# Altium PCB LacewingPXE_v3p1.PcbDoc (part 2 of 2)
Units mm, origin at the board's own origin, x right, y up, seen from the top; angles counter-clockwise.
Board outline 62.74 x 108.59 mm, 2 copper layers (Top Layer, Bottom Layer); 114 components, 91 nets, 535 pads, 84 vias.
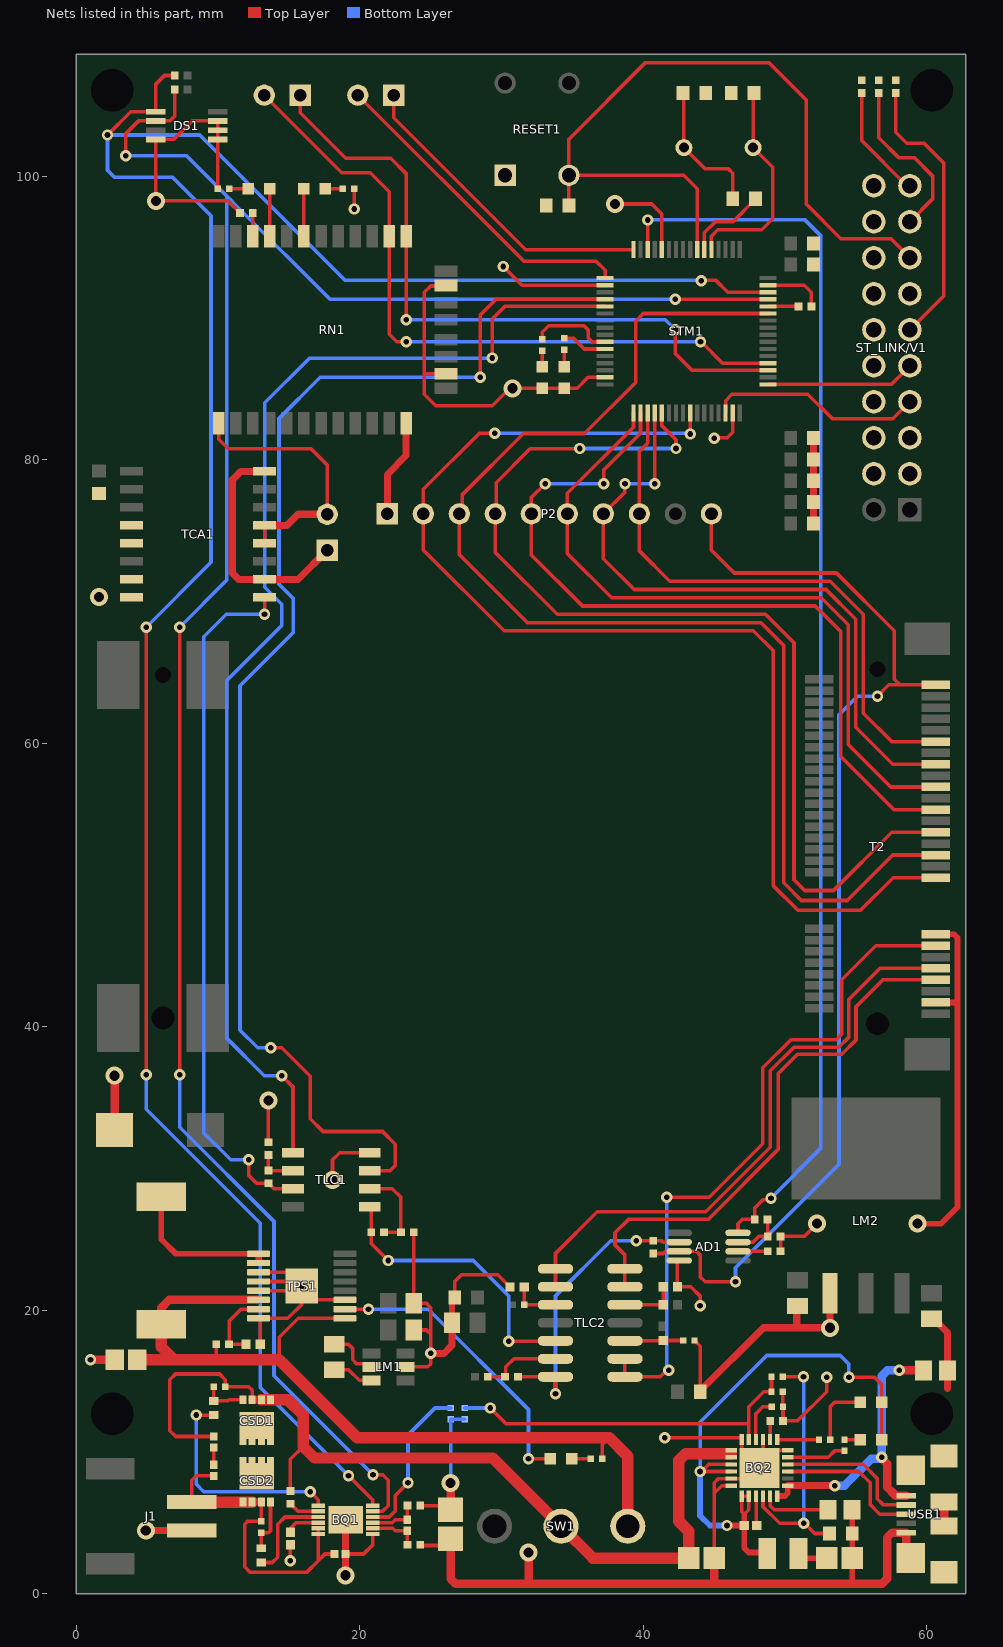
[diagram p2: the nets of this part, all layers, seen from the top]

## Via types
v1: diameter 0.8, hole 0.4, Top Layer to Bottom Layer, 66 vias
v2: diameter 1.27, hole 0.711, Top Layer to Bottom Layer, 18 vias

## Nets (pads, with @x,y where several pads share a name; then routed paths per layer and width w, separated by ;. In a path a pad name is that pad's centre, name@x,y a point inside that pad or via, vN(x,y) a via of type N, cw(c..) or ccw(c..) an arc to the next point about the centre after c; other vN are vias at no path point) (continued)
BAT+: BQ1.11 BQ1.12 C2.2 C11.1 CSD2.1 CSD2.2 CSD2.3 J1.1 R14.2 | length 23.1
  Top Layer w0.254: J1.1@8.149,6.461 8.149,8 8.459,8.31 C11.1@9.7,8.31 ; CSD2.3@13.05,6.461 R14.2@13.05,5.1 12.077,5.1 11.877,4.9 11.877,1.896 12.273,1.5 16.241,1.5 17.075,2.334 ; BQ1.11@17.075,4.613 BQ1.12@17.075,4.213 17.075,2.334 ; C2.2@18.21,2.8 17.541,2.8 17.075,2.334
  Top Layer w0.5: CSD2.2@12.4,6.461 CSD2.3@13.05,6.461
  Top Layer w0.8: J1.1@8.149,6.461 CSD2.1@11.75,6.461 CSD2.2@12.4,6.461
BAT-: BQ1.1 BQ1.13 C1.1 C2.1 J1.2 R1.2 R3.1 R6.1 R7.2 | length 20.9
  Top Layer w0.254: v1(15.1,2.334) C1.1@15.1,3.46 ; C2.1@18.99,2.8 20.265,2.8 20.925,3.46 BQ1.1@20.925,4.213 ; BQ1.13@18.99,5.203 BQ1.13@19,5.213 ; R6.1@24.255,6.213 26.112,6.213 R1.2@26.4,5.925
  Top Layer w0.5: v2(4.9,4.461) J1.2@8.149,4.461 ; BQ1.13@18.99,5.203 C2.1@18.99,2.8 19,2.79 v2(19,1.3)
  Top Layer w0.6: R1.2@26.4,5.925 v2(26.4,7.822)
  Bottom Layer w0.254: v2(26.4,7.822) R3.1@26.4,12.3 R7.2@27.4,12.3
BQ_SYS: BQ2.15 BQ2.16 BQ2.19 BQ2.20 C8.2 L1.1 PG.A STAT.A | length 41.9
  Top Layer w0.254: v1(44,8.622) v1@44.105,8.622 ; BQ2.16@46.188,8.622 v1@44.105,8.622 ; BQ2.15@46.188,9.122 44.605,9.122 v1@44.105,8.622 ; v1(54.5,15.266) 56.3,15.266 56.81,14.756 PG.A@56.81,13.5 STAT.A@56.81,10.872 ; 46.938,5.791 BQ2.19@46.938,6.872 BQ2.20@47.438,6.872 47.438,5.931 47.118,5.611 46.938,5.791
  Top Layer w0.4: v1(45.9,4.811) C8.2@47.118,4.811 ; 47.118,5.611 C8.2@47.118,4.811 ; L1.1@48.738,2.836 48.672,2.902 47.438,2.902 47.118,3.222 C8.2@47.118,4.811
  Bottom Layer w0.254: v1(44,8.622) 44,12.1 48.7,16.8 53.888,16.8 54.5,16.188 v1(54.5,15.266)
  Bottom Layer w0.4: v1(44,8.622) 44,5.5 44.689,4.811 v1(45.9,4.811)
GND: AD1.4 BQ2.6 BQ2.9 BQ2.12 BQ2.17 BQ2.18 BQ2.25 C4.2 C5.1 C6.1 C7.1 C9.1 C12.1 C13.2 C14.1 C15.2 C16.1 C18.2 C19.2 C20.2 C21.2 C22.2 C23.2 C24.2 C25.2 C26.2 C27.2 C28.2 C29.2 C30.2 C31.2 C32.2 D1.C D2.C DS1.4 DS1.5 DS1.6 DS1.7 LM1.2 LM2.1 P1.2 P2.1 R1.1 R2.1 R4.1 R5.1 R9.1 R18.1 R21.1 R22.1 R24.1 R26.1 R27.1 R28.1 R29.1 R39.1 R40.1 R41.1 R44.1 R46.1 R47.1 R48.1 RESET1.1 RN1.1 RN1.12 RN1.28 RN1.29 ST_LINK/V1.3 ST_LINK/V1.4 ST_LINK/V1.5 ST_LINK/V1.6 ST_LINK/V1.8 ST_LINK/V1.10 ST_LINK/V1.12 ST_LINK/V1.13 ST_LINK/V1.14 ST_LINK/V1.16 ST_LINK/V1.18 ST_LINK/V1.20 STM1.12 STM1.18 STM1.31 STM1.47 STM1.63 T2.3 T2.15 TCA1.4 TCA1.5 TCA1.7 TCA1.8 TCA1.12 TCA1.13 TLC1.4 TPS1.3 TPS1.4 TPS1.5 TPS1.8 TPS1.11 TPS1.PowerPAD USB1.5 USB1.6 USB1.7 USB1.8 USB1.9 USB1.10 USB1.11 | length 297.3
  Top Layer w0.254: R46.1@9.984,99.1 DS1.5@9.984,102.584 DS1.6@9.984,103.234 DS1.7@9.984,103.884 9.976,103.892 8.2,103.892 6.892,102.584 DS1.4@5.616,102.584 v2(5.616,98.243) 10.707,98.243 R48.1@11.55,97.4 ; RN1.1@10.059,82.552 10.059,81.423 10.719,80.764 16.558,80.764 17.7,79.621 P1.2@17.7,76.14 ; TPS1.8@12.85,19.425 14.925,19.425 15.9,20.4 15.9,21.625 16.8,20.725 TPS1.11@18.95,20.725 ; TPS1.5@12.85,21.375 15.575,21.375 v1(15.9,21.7) TPS1.PowerPAD@15.575,22.025 ; TPS1.4@12.85,22.025 TPS1.PowerPAD@15.575,22.025 ; TPS1.3@12.85,22.675 14.925,22.675 TPS1.PowerPAD@15.575,22.025 ; R18.1@12.97,17.6 TPS1.8@12.97,19.327 ; TCA1.12@13.28,74.09 TCA1.13@13.28,75.36 ; R22.1@13.551,31.85 v2(13.551,34.793) ; v2(18.073,29.187) 18.073,30.6 18.578,31.105 TLC1.4@20.712,31.105 ; v1(19.6,97.673) R47.1@19.6,99.1 ; LM1.2@23.223,16 24.791,16 24.999,16.208 v1(24.999,16.95) 24.999,18.299 25,18.3 ; R21.1@23.798,25.5 23.798,20.502 C14.1@23.8,20.5 24.675,20.5 25,20.175 25,18.3 ; C16.1@23.8,18.6 24.7,18.6 25,18.3 ; R5.1@24.255,3.46 24.315,3.4 25.925,3.4 R1.1@26.4,3.875 ; RN1.29@26.082,86.052 24.552,86.052 ; RN1.28@26.082,92.276 26.044,92.238 24.999,92.238 24.552,91.791 24.552,86.052 ; C22.2@26.7,20.9 26.7,22.025 27.175,22.5 29.725,22.5 R27.1@30.6,21.625 ; v1(30.123,93.62) 31.443,92.3 STM1.18@37.3,92.3 ; STM1.31@37.3,85.8 36.1,85.8 35.326,85.026 D2.C@34.418,85.026 D1.C@32.863,85.026 v2(30.756,85.026) 30.57,85.026 29.335,83.792 25.363,83.792 24.552,84.603 24.552,86.052 ; v2(38.008,98.026) 40.591,98.026 41.3,97.317 STM1.12@41.3,94.8 ; v1(41.502,11) 46.915,11 46.938,10.977 BQ2.12@46.938,10.872 46.938,10.122 BQ2.25@48.188,8.872 ; AD1.4@42.524,23.5 42.491,23.5 42.4,23.409 R29.1@42.4,21.65 43.35,21.65 44,21 v1(44,20.3) ; R28.1@43.605,17.861 44.004,17.461 44.004,14.291 C21.2@44.005,14.241 ; C4.2@45,2.511 45,7.1 ; v1(45,81.5) 45.034,81.534 45.912,81.534 46.3,81.922 STM1.47@46.3,83.3 ; BQ2.18@46.188,7.622 45.522,7.622 45,7.1 ; BQ2.9@48.438,10.872 BQ2.25@48.438,9.122 ; STM1.63@48.8,92.3 51.35,92.3 51.85,91.8 R44.1@51.85,90.8 ; R24.1@49.676,24.15 R26.1@49.676,25.2 51.337,25.2 v2(52.237,26.1) ; R4.1@49.838,14.247 49.844,14.241 49.844,13.199 R9.1@49.849,13.193 ; R9.1@49.849,13.193 R2.1@49.85,12.19 50.872,12.19 52.928,14.245 v1(52.928,15.266) ; BQ2.6@50.188,10.122 49.438,10.122 BQ2.25@48.438,9.122 ; ST_LINK/V1.8@56.261,84.074 ST_LINK/V1.8@56.57,84.074 ; USB1.6@58.539,2.511 USB1.6@58.864,2.511 ; 45,7.1 45,7.822 45.3,8.122 BQ2.17@46.188,8.122 47.438,8.122 BQ2.25@48.188,8.872 ; BQ2.25@48.188,8.872 BQ2.25@48.438,9.122
  Top Layer w0.4: C13.2@26.5,19.1 26.5,20.7 C22.2@26.7,20.9 ; 54.728,0.7 C7.1@54.728,2.511 C5.1@54.728,4.25 C6.1@54.728,5.925 ; v2(59.346,26.1) 60.999,26.1 62.161,27.262 62.161,41.471 ; T2.15@60.603,46.494 T2.15@60.615,46.505 61.927,46.505 62.161,46.271 62.161,41.471 ; T2.3@60.615,41.705 61.927,41.705 62.161,41.471
  Top Layer w0.5: TCA1.13@13.28,75.36 14.87,75.36 15.65,76.14 P1.2@17.7,76.14 ; P2.1@21.94,76.172 21.94,78.954 23.263,80.277 RN1.12@23.263,82.552 ; v1(24.999,16.95) 25.925,16.95 26.5,17.525 C13.2@26.5,19.1 ; C21.2@44.004,14.291 48.472,18.759 50.816,18.759 ; C19.2@50.872,20.3 50.816,20.244 50.816,18.759 ; C26.2@52,75.494 C27.2@52,77 C28.2@52,78.5 C29.2@52,80 C30.2@52,81.53 ; LM2.1@53.16,21.2 v2(53.16,18.759) 50.816,18.759 ; C18.2@60.325,19.4 60.475,19.4 61.45,18.425 C9.1@61.45,15.752 61.45,14.462
  Top Layer w0.6: v1(1,16.5) C12.1@2.7,16.5 ; v2(2.7,36.537) 2.702,36.535 C15.2@2.702,32.693 ; R1.1@26.4,3.875 26.4,1.051 26.751,0.7 31.9,0.7 ; v2(31.9,2.902) 31.9,0.7 ; C4.2@45,2.511 45,0.7 ; USB1.6@58.539,2.511 USB1.5@58.539,4.311 57.544,4.311 57.193,3.96 57.193,1.051 56.841,0.7 54.728,0.7 45,0.7 ; USB1.8@61.214,4.761 USB1.9@61.214,6.461 ; 31.9,0.7 45,0.7
  other v2: 1.6,70.3
I2C_SCL: BQ1.5 DS1.2 R32.1 STM1.61 | length 163.7
  Top Layer w0.254: v1(3.5,101.425) 3.5,103 4.384,103.884 DS1.2@5.616,103.884 6.6,103.884 6.95,104.234 R32.1@6.95,106.092 ; v1(7.296,36.603) v1(7.296,68.18) ; BQ1.5@20.925,5.813 21.6,5.813 22,6.213 22,8.006 21.623,8.383 21.029,8.383 v1(20.925,8.383) ; v1(42.251,91.3) STM1.61@48.8,91.3
  Bottom Layer w0.254: v1(3.5,101.425) 7.775,101.425 ; v1(7.296,36.603) 7.296,32.904 13.944,26.256 13.944,15.364 v1(20.925,8.383) ; v1(7.296,68.18) 10.6,71.484 10.6,98.6 ; v1(42.251,91.3) 17.9,91.3 11.5,97.7 ; 7.775,101.425 10.6,98.6 ; 7.775,101.425 10.6,98.6 ; 10.6,98.6 11.5,97.7 ; 10.6,98.6 11.5,97.7
I2C_SDA: BQ1.6 DS1.1 R31.1 STM1.62 | length 169.5
  Top Layer w0.254: v1(2.2,102.894) 3.84,104.534 DS1.1@5.616,104.534 5.616,106.492 6.216,107.092 R31.1@6.95,107.092 ; v1(4.934,36.603) v1(4.934,68.18) ; v1(19.2,8.31) 20.925,6.585 BQ1.6@20.925,6.213 ; v1(44.075,92.61) 44.123,92.658 45.092,92.658 45.95,91.8 STM1.62@48.8,91.8
  Bottom Layer w0.254: v1(4.934,36.603) 4.934,34.166 12.97,26.13 12.97,14.54 v1(19.2,8.31) ; v1(4.934,68.18) 9.5,72.746 9.5,97.2 6.777,99.923 2.677,99.923 2.2,100.4 v1(2.2,102.894) 8.706,102.894 18.942,92.658 44.026,92.658 v1(44.075,92.61)
IREF_ADC: AD1.8 R33.2 STM1.14 | length 88.3
  Top Layer w0.254: STM1.14@40.3,94.8 v1(40.3,96.901) ; AD1.8@46.674,25.45 46.674,26.1 46.974,26.4 R33.2@47.85,26.4 47.85,27.212 48.436,27.798 48.893,27.798 v1(48.998,27.902)
  Bottom Layer w0.254: v1(40.3,96.901) 51.399,96.901 52.5,95.8 52.5,31.405 v1(48.998,27.902)
NetAD1_6: AD1.6 R24.2 | length 2.1
  Top Layer w0.254: AD1.6@46.674,24.15 R24.2@48.776,24.15
NetAD1_7: AD1.7 R26.2 R33.1 | length 3.5
  Top Layer w0.254: AD1.7@46.674,24.8 47.738,24.8 48.138,25.2 R26.2@48.776,25.2 48.763,25.213 48.763,26.387 R33.1@48.75,26.4
NetBQ1_2: BQ1.2 C3.1 R5.2 | length 3.5
  Top Layer w0.254: BQ1.2@20.925,4.613 22.32,4.613 22.5,4.433 23.348,4.433 C3.1@23.35,4.435 23.353,4.433 23.353,3.463 R5.2@23.355,3.46
NetBQ1_3: BQ1.3 C3.2 R6.2 | length 3.5
  Top Layer w0.254: BQ1.3@20.925,5.013 22.295,5.013 22.5,5.218 23.348,5.218 C3.2@23.35,5.215 23.353,5.218 23.353,6.211 R6.2@23.355,6.213
NetBQ1_4: BQ1.4 R3.2 | length 11.3
  Top Layer w0.254: BQ1.4@20.925,5.413 22.077,5.413 22.5,5.836 22.5,6.922 v1(23.4,7.822)
  Bottom Layer w0.254: v1(23.4,7.822) 23.4,11.2 25.3,13.1 R3.2@26.4,13.1
NetBQ1_7: BQ1.7 R10.1 | length 15.6
  Top Layer w0.254: v1(8.459,12.6) R10.1@9.7,12.6 ; v1(16.5,7.2) 17.075,6.625 BQ1.7@17.075,6.213
  Bottom Layer w0.254: v1(8.459,12.6) 8.459,7.741 9,7.2 v1(16.5,7.2)
NetBQ1_8: BQ1.8 R12.1 | length 2.2
  Top Layer w0.254: R12.1@15.1,6.35 15.637,5.813 BQ1.8@17.075,5.813
NetBQ1_9: BQ1.9 R11.1 | length 6.7
  Top Layer w0.254: R11.1@13.05,2.2 13.827,2.2 14.204,2.577 14.204,4.9 14.717,5.413 BQ1.9@17.075,5.413
NetBQ1_10: BQ1.10 C1.2 | length 2.4
  Top Layer w0.254: C1.2@15.1,4.34 15.1,4.613 15.5,5.013 BQ1.10@17.075,5.013
NetBQ2_1: BQ2.1 BQ2.24 C9.2 USB1.1 | length 21.5
  Top Layer w0.4: BQ2.24@49.438,6.897 49.988,6.897 50.188,7.097 BQ2.1@50.188,7.622
  Top Layer w0.5: BQ2.1@50.188,7.622 v1(53.488,7.622) ; v1@56.81,9.562 v1(56.81,9.622)
  Top Layer w0.6: v1@56.81,9.562 57.193,9.179 57.193,7.518 57.8,6.911 USB1.1@58.539,6.911 ; v1(58.052,15.752) C9.2@59.75,15.752
  Bottom Layer w0.254: v1@56.706,9.518 v1(56.81,9.622)
  Bottom Layer w0.6: v1(53.488,7.622) 54.188,7.622 56.084,9.518 v1@56.706,9.518 ; v1(56.81,9.622) 56.81,15.362 57.2,15.752 v1(58.052,15.752)
NetBQ2_5: BQ2.5 R15.1 | length 4.2
  Top Layer w0.254: BQ2.5@50.188,9.622 53.038,9.622 53.488,10.072 R15.1@54.188,10.072
NetBQ2_7: BQ2.7 R16.1 | length 3
  Top Layer w0.254: BQ2.7@49.438,10.872 R16.1@52.388,10.872
NetBQ2_8: BQ2.8 R2.2 | length 1.3
  Top Layer w0.254: BQ2.8@48.938,10.872 48.944,10.878 48.944,12.184 R2.2@48.95,12.19 ; R2.2@48.944,12.194 R2.2@48.95,12.2
NetBQ2_10: BQ2.10 R9.2 | length 3.1
  Top Layer w0.254: BQ2.10@47.938,10.872 47.938,12.7 48.431,13.193 R9.2@49.049,13.193
NetBQ2_11: BQ2.11 R4.2 R7.1 R8.1 | length 25.9
  Top Layer w0.254: v1(29.2,13.1) 30.3,12 47.438,12 ; BQ2.11@47.438,10.872 47.438,12 ; R8.1@49.038,15.3 R4.2@49.038,14.247 48.492,14.247 47.438,13.193 47.438,12
  Bottom Layer w0.254: R7.1@27.4,13.1 v1(29.2,13.1)
NetBQ2_21: BQ2.21 C8.1 | length 2.1
  Top Layer w0.254: BQ2.21@47.938,6.872 47.961,6.849 47.961,4.848 C8.1@47.998,4.811
NetBQ2_22: BQ2.22 C5.2 R8.2 | length 18
  Top Layer w0.254: BQ2.22@48.438,6.872 48.438,6.142 49.619,4.961 v1(51.308,4.961) 51.383,4.961 52.094,4.25 C5.2@53.128,4.25 ; R8.2@49.838,15.3 v1(51.3,15.3)
  Bottom Layer w0.254: v1(51.3,15.3) 51.308,15.292 v1(51.308,4.961)
NetBQ2_23: BQ2.23 C6.2 | length 4.9
  Top Layer w0.254: BQ2.23@48.938,6.872 48.938,6.213 49.226,5.925 C6.2@53.028,5.925
NetC7_2: C7.2 L1.2 | length 2.1
  Top Layer w0.254: L1.2@50.938,2.836 L1.2@51.263,2.511
  Top Layer w0.4: L1.2@51.263,2.511 C7.2@52.928,2.511
NetC10_2: C10.2 C11.2 | length 1.2
  Top Layer w0.254: C11.2@9.7,9.09 C10.2@9.7,10.31
NetC17_1: C17.1 LM1.5 | length 3.8
  Top Layer w0.254: C17.1@18.2,17.6 19.2,17.6 19.5,17.3 19.5,16.5 19.792,16.208 20.615,16.208 LM1.5@20.823,16
NetC17_2: C17.2 LM1.6 | length 2.9
  Top Layer w0.254: C17.2@18.2,15.8 19.2,15.8 19.95,15.05 LM1.6@20.823,15.05
NetC24_1: C24.1 R45.1 X1.2 | length 9.9
  Top Layer w0.254: C24.1@42.8,105.85 42.86,105.79 X1.2@42.86,102 44.36,100.5 46,100.5 46.3,100.2 R45.1@46.3,98.4
NetC25_1: C25.1 STM1.5 X1.1 | length 15.3
  Top Layer w0.254: STM1.5@44.8,94.8 44.8,95.756 45.244,96.2 48.351,96.2 49.133,96.982 49.133,100.607 X1.1@47.74,102 47.74,105.79 C25.1@47.8,105.85
NetCONNECT_A: CONNECT.A RN1.19 | length 3.3
  Top Layer w0.254: CONNECT.A@16.05,99.1 16.05,95.765 RN1.19@16.059,95.756
NetCONNECT_C: CONNECT.C R47.2 | length 1.2
  Top Layer w0.254: CONNECT.C@17.562,99.1 R47.2@18.8,99.1
NetCSD1_4: CSD1.4 R10.2 R13.1 | length 3.1
  Top Layer w0.254: R13.1@9.7,14.6 R10.2@9.7,13.6 10.692,13.6 10.775,13.683 11.747,13.683 CSD1.4@11.75,13.68
NetCSD1_5: CSD1.5 CSD1.6 CSD1.7 CSD1.8 CSD1.9 CSD2.5 CSD2.6 CSD2.7 CSD2.8 CSD2.9 | length 0
  Top Layer w0.254: CSD2.7@12.381,9.441 CSD2.7@12.403,9.463
NetCSD2_4: CSD2.4 R11.2 R14.1 | length 3.8
  Top Layer w0.254: R11.2@13.05,3.2 R14.1@13.05,4.3 13.551,4.3 13.7,4.449 CSD2.4@13.7,6.461
NetD1_A: D1.A R42.1 | length 1.1
  Top Layer w0.254: D1.A@32.863,86.538 R42.1@32.863,87.681
NetD2_A: D2.A R43.1 | length 1.2
  Top Layer w0.254: D2.A@34.418,86.538 R43.1@34.418,87.742
NetL2_2: L2.2 TPS1.1 TPS1.2 | length 10.9
  Top Layer w0.4: L2.2@6,28 6,24.985 7.01,23.975 TPS1.1@12.85,23.975 TPS1.2@12.85,23.325
NetLOW_A: LOW.A R17.2 | length 1.3
  Top Layer w0.254: LOW.A@34.95,9.518 R17.2@36.3,9.518
NetLOW_C: LOW.C TPS1.10 | length 20.9
  Top Layer w0.254: TPS1.10@18.95,20.075 v1(20.615,20.075) ; v1(31.9,9.518) LOW.C@33.438,9.518
  Bottom Layer w0.254: v1(20.615,20.075) 24.825,20.075 31.9,13 v1(31.9,9.518)
NetPG_C: PG.C R16.2 | length 4.6
  Top Layer w0.254: R16.2@53.188,10.872 53.188,13.2 53.488,13.5 PG.C@55.298,13.5
NetR15_2: R15.2 STAT.C | length 1.1
  Top Layer w0.254: R15.2@54.188,10.872 STAT.C@55.298,10.872
NetR18_2: R18.2 R19.2 TPS1.7 | length 5.2
  Top Layer w0.254: R18.2@11.97,17.6 R19.2@10.775,17.6 10.775,19.227 11.623,20.075 TPS1.7@12.85,20.075
NetR21_2: R21.2 R25.1 TLC1.2 | length 6.1
  Top Layer w0.254: TLC1.2@20.712,28.565 20.72,28.557 22.295,28.557 22.898,27.955 R21.2@22.898,25.5 R25.1@21.7,25.5
NetR22_2: R22.2 R23.1 TLC1.6 | length 2.8
  Top Layer w0.254: R22.2@13.551,30.95 R23.1@13.551,29.85 13.559,29.843 15.28,29.843 TLC1.6@15.288,29.835
NetR37_1: R37.1 R38.2 TLC2.13 | length 5.7
  Top Layer w0.254: R38.2@29.028,15.3 R37.1@30.25,15.3 30.3,15.35 30.3,16 30.87,16.57 TLC2.13@33.8,16.57
NetR39_2: R39.2 ST_LINK/V1.19 | length 8.1
  Top Layer w0.254: R39.2@55.4,105.85 55.4,102.5 58.586,99.314 ST_LINK/V1.19@58.801,99.314
NetR40_2: R40.2 ST_LINK/V1.17 | length 12
  Top Layer w0.254: R40.2@56.6,105.85 56.6,102.7 58,101.3 59.1,101.3 60.4,100 60.4,98.373 ST_LINK/V1.17@58.801,96.774
NetR41_2: R41.2 ST_LINK/V1.11 | length 19.8
  Top Layer w0.254: R41.2@57.8,105.85 57.8,103.086 58.586,102.3 59.8,102.3 61.2,100.9 61.2,91.553 ST_LINK/V1.11@58.801,89.154
NetR42_2: R42.2 STM1.26 | length 5.9
  Top Layer w0.254: R42.2@32.863,88.481 32.863,88.972 33.327,89.436 35.818,89.436 36.1,89.154 36.1,88.6 36.4,88.3 STM1.26@37.3,88.3
NetR43_2: R43.2 STM1.27 | length 3.2
  Top Layer w0.254: R43.2@34.418,88.542 35.079,88.542 35.821,87.8 STM1.27@37.3,87.8
NetR44_2: R44.2 STM1.60 | length 2.1
  Top Layer w0.254: STM1.60@48.8,90.8 R44.2@50.95,90.8
NetR45_2: R45.2 STM1.6 | length 5.8
  Top Layer w0.254: STM1.6@44.3,94.8 44.3,95.989 45.085,96.774 46.324,96.774 47.9,98.35 R45.2@47.9,98.4
NetR46_2: R46.2 STATE.C | length 1.4
  Top Layer w0.254: R46.2@10.784,99.1 STATE.C@12.138,99.1
NetR48_2: R48.2 RN1.22 | length 1.6
  Top Layer w0.254: R48.2@12.45,97.4 12.45,95.765 RN1.22@12.459,95.756
NetRN1_21: RN1.21 STATE.A | length 3.3
  Top Layer w0.254: STATE.A@13.65,99.1 13.65,95.765 RN1.21@13.659,95.756
NRST: C23.1 RESET1.3 ST_LINK/V1.15 STM1.7 | length 54.7
  Top Layer w0.254: C23.1@34.75,97.927 RESET1.3@34.75,100.05 ; STM1.7@43.8,94.8 43.8,99.1 42.85,100.05 RESET1.3@34.75,100.05 ; ST_LINK/V1.15@58.801,94.234 57.468,95.567 53.933,95.567 51.5,98 51.5,105.351 48.851,108 40.15,108 34.75,102.6 RESET1.3@34.75,100.05
PACK+: BQ2.13 BQ2.14 C4.1 C10.1 CSD1.1 CSD1.2 CSD1.3 R12.2 R13.2 SW1.2 | length 65.6
  Top Layer w0.254: C10.1@9.7,11.09 7.01,11.09 6.6,11.5 6.6,15.1 7,15.5 10.1,15.5 10.5,15.1 R13.2@10.5,14.6 12.165,14.6 12.403,14.362 12.403,13.683 CSD1.3@12.4,13.68 ; R12.2@15.1,7.25 15.1,9.482 16,10.382
  Top Layer w0.5: CSD1.3@12.4,13.68 CSD1.2@13.05,13.68
  Top Layer w0.8: CSD1.2@13.05,13.68 CSD1.1@13.7,13.68 14.92,13.68 16,12.6 16,10.382 16.814,9.568 29.378,9.568 SW1.2@34.205,4.742 ; SW1.2@34.2,4.761 SW1.2@34.205,4.742 ; 46.188,9.872 42.969,9.872 42.5,9.403 42.5,5.112 43.205,4.408 C4.1@43.205,2.511 36.435,2.511 SW1.2@34.205,4.742
SPI_MISO: P2.8 STM1.35 T2.41 | length 40.5
  Top Layer w0.254: STM1.35@40.3,83.3 40.3,81.171 39.72,80.591 P2.8@39.72,76.172 39.72,73.547 41.85,71.417 53.183,71.417 55.509,69.091 55.509,62.105 57.509,60.105 T2.41@60.615,60.105
SPI_MOSI: P2.7 STM1.36 T2.37 | length 46.9
  Top Layer w0.254: v1(38.7,78.3) 38.7,77.692 P2.7@37.18,76.172 37.18,73 39.347,70.833 52.886,70.833 54.982,68.737 54.982,61.117 57.594,58.505 T2.37@60.615,58.505 ; v1(40.8,78.3) STM1.36@40.8,83.3
  Bottom Layer w0.254: v1(38.7,78.3) v1(40.8,78.3)
SPI_SCK: P2.5 STM1.34 T2.29 | length 56.8
  Top Layer w0.254: v1(33.073,78.3) 32.1,77.327 P2.5@32.1,76.172 32.1,73.267 35.7,69.667 52.128,69.667 53.927,67.868 53.927,59.06 57.682,55.305 T2.29@60.615,55.305 ; v1(37.2,78.3) 37.2,79.264 39.8,81.864 STM1.34@39.8,83.3
  Bottom Layer w0.254: v1(33.073,78.3) v1(37.2,78.3)
SPI_SS: P2.6 STM1.33 T2.33 | length 49.6
  Top Layer w0.254: STM1.33@39.3,83.3 39.3,82.273 34.64,77.613 P2.6@34.64,76.172 34.64,73.376 37.766,70.25 52.55,70.25 54.455,68.345 54.455,59.905 57.455,56.905 T2.33@60.615,56.905
SWCLK: ST_LINK/V1.9 STM1.49 | length 10.5
  Top Layer w0.254: STM1.49@48.8,85.3 57.487,85.3 ST_LINK/V1.9@58.801,86.614
SWDIO: ST_LINK/V1.7 STM1.46 | length 15.3
  Top Layer w0.254: STM1.46@45.8,83.3 45.8,84.156 46.244,84.6 51.601,84.6 53.334,82.867 57.594,82.867 ST_LINK/V1.7@58.801,84.074
TTN_CLK: P2.4 STM1.37 T2.25 | length 74
  Top Layer w0.254: v1(35.504,80.776) 35.492,80.764 32.008,80.764 29.617,78.373 29.617,76.229 P2.4@29.56,76.172 29.56,73.441 33.917,69.083 48.609,69.083 50.623,67.07 50.623,50.355 51.377,49.6 53.404,49.6 57.509,53.705 T2.25@60.615,53.705 ; STM1.37@41.3,83.3 41.3,82.4 42.3,81.4 v1(42.3,80.776)
  Bottom Layer w0.254: v1(35.504,80.776) v1(42.3,80.776)
TTN_PWM: P2.3 STM1.59 T2.21 | length 88.6
  Top Layer w0.254: STM1.59@48.8,90.3 39.986,90.3 39.451,89.765 39.451,85.44 35.821,81.81 31.517,81.81 27.21,77.503 27.21,76.362 P2.3@27.02,76.172 27,76.192 27,73.317 31.817,68.5 48.281,68.5 49.898,66.882 49.898,50.144 ; 49.9,50.144 51.144,48.9 54.389,48.9 57.594,52.105 T2.21@60.615,52.105
TTN_ready: P2.2 STM1.41 T2.17 | length 83.6
  Top Layer w0.254: v1(29.509,81.864) 28.444,81.864 24.48,77.9 P2.2@24.48,76.172 24.48,73.62 30.184,67.916 47.761,67.916 49.174,66.503 49.174,49.926 50.9,48.2 55.316,48.2 57.621,50.505 T2.17@60.615,50.505 ; v1(43.295,81.805) 43.3,81.81 STM1.41@43.3,83.3
  Bottom Layer w0.254: v1(29.509,81.864) 43.236,81.864 v1(43.295,81.805)
UART_RX: RN1.14 STM1.52 UART1.2 | length 49.3
  Top Layer w0.254: UART1.2@13.26,105.7 18.735,100.225 20.726,100.225 22.069,98.883 RN1.14@22.069,95.756 22.069,88.831 22.6,88.3 v1(23.263,88.3) ; v1(44.026,88.3) 44.085,88.3 45.585,86.8 STM1.52@48.8,86.8
  Bottom Layer w0.254: v1(23.263,88.3) v1(44.026,88.3)
UART_TX: RN1.13 STM1.51 UART1.1 | length 48.8
  Top Layer w0.254: UART1.1@15.8,105.7 15.8,104.469 19.015,101.254 22.186,101.254 23.263,100.177 RN1.13@23.263,95.756 v1(23.263,89.863) ; v1(42.26,89.154) 42.26,87.469 43.429,86.3 STM1.51@48.8,86.3
  Bottom Layer w0.254: v1(23.263,89.863) 41.551,89.863 v1(42.26,89.154)
USART_RX: STM1.17 UART2.2 | length 23.1
  Top Layer w0.254: UART2.2@19.86,105.7 31.56,94 36.644,94 37.3,93.344 STM1.17@37.3,92.8
USART_TX: STM1.16 UART2.1 | length 22.3
  Top Layer w0.254: UART2.1@22.4,105.7 22.4,104.108 31.708,94.8 STM1.16@39.3,94.8
USB_D+: BQ2.3 USB1.3 | length 10.5
  Top Layer w0.254: BQ2.3@50.188,8.622 55.2,8.622 56,7.822 56,6.293 56.682,5.611 USB1.3@58.539,5.611
USB_D-: BQ2.4 USB1.2 | length 10.4
  Top Layer w0.254: BQ2.4@50.188,9.122 55.5,9.122 56.5,8.122 56.5,6.7 56.939,6.261 USB1.2@58.539,6.261
VBAT: C12.2 L2.1 R17.1 R19.1 SW1.1 TPS1.6 TPS1.9 | length 63
  Top Layer w0.254: 9.875,16.5 R19.1@9.875,17.6 ; 14.314,16.5 14.314,18.081 15.658,19.425 TPS1.9@18.95,19.425 ; R17.1@37.1,9.518 37.1,10.5 37.6,11
  Top Layer w0.6: L2.1@6,19 6,20.175 6.55,20.725 TPS1.6@12.85,20.725
  Top Layer w0.8: C12.2@4.3,16.5 6.9,16.5 ; L2.1@6,19 6,17.4 6.9,16.5 ; SW1.1@38.9,4.761 38.9,9.7 37.6,11 19.814,11 14.314,16.5 9.875,16.5 6.9,16.5
Vcharge: R29.2 R36.1 TLC2.5 | length 4
  Top Layer w0.254: TLC2.5@38.7,20.38 R36.1@41.405,20.38 41.405,21.65 R29.2@41.4,21.65
Vcharge_buf: T2.7 TLC2.6 TLC2.7 | length 38.6
  Top Layer w0.254: TLC2.6@38.7,21.65 TLC2.7@38.7,22.92 38.7,23.896 38,24.596 38,25.45 38.95,26.4 44.574,26.4 49.5,31.326 49.5,36.677 50.878,38.055 54,38.055 55,39.055 55,41.405 56.9,43.305 T2.7@60.615,43.305
Vdac: R28.2 R35.1 TLC2.3 | length 4.1
  Top Layer w0.254: TLC2.3@38.7,17.84 38.71,17.85 41.39,17.85 R35.1@41.4,17.861 R28.2@42.804,17.861
Vdac_buf: T2.13 TLC2.1 TLC2.2 | length 48.5
  Top Layer w0.254: TLC2.2@38.7,16.57 TLC2.1@38.7,15.3 41.2,15.3 41.652,15.752 v1(41.8,15.752) ; v1(41.652,27.955) 44.655,27.955 48.431,31.731 48.431,37.093 50.418,39.08 53.606,39.08 54,39.474 54,43.305 56.4,45.705 T2.13@60.615,45.705
  Bottom Layer w0.254: v1(41.652,27.955) 41.652,15.9 v1(41.8,15.752)
VDAC_electrode: STM1.20 TLC1.3 | length 93.6
  Top Layer w0.254: v1(13.719,38.5) 14.5,38.5 16.5,36.5 16.5,33.5 17.4,32.6 21.6,32.6 22.5,31.7 22.5,30.202 22.133,29.835 TLC1.3@20.712,29.835 ; v1(28.5,85.8) 28.5,90.19 29.61,91.3 STM1.20@37.3,91.3
  Bottom Layer w0.254: v1(13.719,38.5) 12.8,38.5 11.549,39.751 11.549,64.049 15.3,67.8 15.3,70.2 14.3,71.2 14.3,82.9 17.2,85.8 v1(28.5,85.8)
VDAC_electrode_amp: R25.2 TLC1.1 TLC2.12 | length 20.4
  Top Layer w0.254: TLC1.1@20.712,27.295 20.8,27.207 R25.2@20.8,25.5 20.8,24.7 v1(22,23.5) ; v1(30.5,17.8) 33.76,17.8 TLC2.12@33.8,17.84
  Bottom Layer w0.254: v1(22,23.5) 28,23.5 30.5,21 v1(30.5,17.8)
VDAC_peltier: STM1.21 TLC1.5 | length 86.1
  Top Layer w0.254: v1(14.5,36.535) 15.288,35.747 TLC1.5@15.288,31.105 ; v1(29.343,87.159) 29.343,89.916 30.227,90.8 STM1.21@37.3,90.8
  Bottom Layer w0.254: v1(14.5,36.535) 13.265,36.535 10.6,39.2 10.6,64.4 14.5,68.3 14.5,69.8 13.3,71 13.3,84 16.459,87.159 v1(29.343,87.159)
VDAC_peltier_amp: R23.2 TCA1.9 TLC1.7 | length 49.7
  Top Layer w0.254: v1(12.165,30.6) 12.165,29.5 12.715,28.95 R23.2@13.551,28.95 13.944,28.557 15.28,28.557 TLC1.7@15.288,28.565 ; v1(13.28,69.083) TCA1.9@13.28,70.28
  Bottom Layer w0.254: v1(12.165,30.6) 10.9,30.6 9,32.5 9,67.5 10.583,69.083 v1(13.28,69.083)
Velectrode_buf: AD1.2 R30.2 R37.2 TLC2.14 | length 21.1
  Top Layer w0.254: R37.2@31.15,15.3 TLC2.14@33.8,15.3 v1(33.8,14.1) ; v1(39.5,24.9) R30.2@40.7,24.9 41.29,24.9 41.39,24.8 AD1.2@42.524,24.8
  Bottom Layer w0.254: v1(33.8,14.1) 33.8,21 37.7,24.9 v1(39.5,24.9)
Vpeltier_buf: P1.1 TCA1.10 TCA1.16 | length 16.8
  Top Layer w0.5: TCA1.16@13.28,79.17 11.623,79.17 11,78.547 11,72.009 11.459,71.55 TCA1.10@13.28,71.55 15.65,71.55 P1.1@17.7,73.6
VREF_electrode: AD1.3 P2.10 R30.1 T2.51 | length 80.2
  Top Layer w0.254: R30.1@40.7,24 41.39,24 41.502,24.112 42.486,24.112 AD1.3@42.524,24.15 43.746,24.15 44,23.896 44,22.355 44.355,22 v1(46.5,22) ; P2.10@44.8,76.172 44.8,73.6 46.4,72 53.616,72 57.7,67.916 57.7,64.505 58.1,64.105 ; v1(56.515,63.305) 57.315,64.105 58.1,64.105 ; T2.51@60.615,64.105 58.1,64.105
  Bottom Layer w0.254: v1(46.5,22) 46.5,23 53.8,30.3 53.8,62 55.105,63.305 v1(56.515,63.305)
Vtemp: R27.2 R34.1 TLC2.10 | length 3.5
  Top Layer w0.254: R27.2@31.6,21.625 31.594,21.619 31.594,20.386 R34.1@31.588,20.38 TLC2.10@33.8,20.38
Vtemp_buf: T2.9 TLC2.8 TLC2.9 | length 42.2
  Top Layer w0.254: TLC2.9@33.8,21.65 TLC2.8@33.8,22.92 33.8,24 36.74,26.94 44.39,26.94 48.95,31.5 48.95,36.882 50.623,38.555 53.791,38.555 54.5,39.264 54.5,41.924 56.681,44.105 T2.9@60.615,44.105
pads on no net: BQ2.2 DS1.3 J1.MP1 J1.MP2 RESET1.2 RESET1.4 RN1.2 RN1.3 RN1.4 RN1.5 RN1.6 RN1.7 RN1.8 RN1.9 RN1.10 RN1.15 RN1.16 RN1.17 RN1.18 RN1.20 RN1.23 RN1.24 RN1.30 RN1.31 RN1.32 RN1.33 RN1.34 RN1.35 STM1.2 STM1.3 STM1.4 STM1.8 STM1.9 STM1.10 STM1.11 STM1.15 STM1.22 STM1.23 STM1.24 STM1.25 STM1.28 STM1.29 STM1.30 STM1.38 STM1.39 STM1.40 STM1.42 STM1.43 STM1.44 STM1.45 STM1.50 STM1.53 STM1.54 STM1.55 STM1.56 STM1.57 STM1.58 SW1.3 T1.MH3 T1.MH4 T1.MP1L T1.MP2L T1.MP3L T1.MP4L T2.2 T2.4 T2.5 T2.6 T2.8 T2.10 T2.11 T2.12 T2.14 T2.16 T2.18 T2.19 T2.20 T2.22 T2.23 T2.24 T2.26 T2.27 T2.28 T2.30 T2.31 T2.32 T2.34 T2.35 T2.36 T2.38 T2.39 T2.40 T2.42 T2.43 T2.44 T2.46 T2.47 T2.48 T2.50 T2.52 T2.MH1 T2.MH2 T2.MP1C T2.MP2C TCA1.2 TCA1.3 TCA1.6 TCA1.11 TCA1.14 TCA1.15 TPS1.12 USB1.4

## Polygon pours and split planes (outlines as drawn)
GND on Bottom Layer "GND_L02_P122" (solid, pour order 122): 62.224,69.612 62.224,39.142 50,39.142 50,69.614 49.9,69.614
GND on Bottom Layer "GND_L02_P121" (solid, pour order 121): 30.966,27.9 19,27.9 19,14.657 31.001,14.657
GND on Bottom Layer "GND_L02_P118" (solid, pour order 118): 30.5,0.5 62.5,0.5 62.5,39.5 50,39.5 50,27.955 30.5,27.955
GND on Bottom Layer "GND_L02_P119" (solid, pour order 119): 0.5,69.55 12.5,69.55 12.5,36 19.601,36 19.601,14.54 0.514,14.54
GND on Bottom Layer "GND_L02_P115" (solid, pour order 115): 0.5,108 0.5,69 62.2,69 62.2,108
BAT- on Bottom Layer "BAT-_L02_P111" (solid, pour order 111): 0.5,0.5 0.5,7 22,7 22,9 27.5,9 27.5,0.5
no net on Bottom Layer "NONET_L02_P105" (solid, pour order 105): 0.127,0.127
no net on Bottom Layer "Bottom Layer-No Net 1" (solid, pour order 54): 18.923,81.534
no net on Bottom Layer "Bottom Layer-No Net 2" (solid, pour order 0): -30.861,61.214
GND on Top Layer "GND_L01_P116" (solid, pour order 116): 0.5,79.2 7,79.2 7,69.083 0.5,69.083
GND on Top Layer "GND_L01_P114" (solid, pour order 114): 27.6,108.6 27.6,96.5 51.5,96.5 51.5,73.3 62.8,73.3 62.8,108.6
GND on Top Layer "GND_L01_P113" (solid, pour order 113): 57.8,16.5 57.8,0.254 62.5,0.254 62.5,16.5
NetCSD1_5 on Top Layer "NETCSD1_5_L01_P107" (solid, pour order 107): 10.5,12.9 10.5,7.2 14.5,7.2 14.5,12.9
no net on Top Layer "NONET_L01_P103" (solid, pour order 103): 16.637,37.719
no net on Top Layer "NONET_L01_P096" (solid, pour order 96): 28.448,23.18
no net on Top Layer "NONET_L01_P095" (solid, pour order 95): 19.052,19.517
no net on Top Layer "NONET_L01_P094" (solid, pour order 94): 17.653,18.867
no net on Top Layer "Top Layer-No Net" (solid, pour order 40): 13.081,78.74
no net on Top Layer "Top Layer-No Net 1" (solid, pour order 30): 11.303,35.179
no net on Top Layer "Top Layer-No Net 2" (solid, pour order 16): 62.738,17.018
no net on Top Layer "Top Layer-No Net 3" (solid, pour order 4): 0,108.585
no net on Top Layer "Top Layer-No Net 4" (solid, pour order 2): -0.127,108.839

## Keep-outs
Keep-Out Layer:
  lines w0.5: 19.188,64.705 19.188,40.672 43.188,40.672 43.188,64.705 19.377,64.705 ; 0,0 62.738,0 62.738,108.585 0,108.585 0,0

## Other copper
Top Layer:
  pour cut-out: 0.5,81.5 5.1,81.5
  pour cut-out: 45.5,38.5 45.5,67 17,67 17,38.5
Bottom Layer:
  pour cut-out: 19.601,36 19.601,32.5 16.366,32.5 16.366,36
  pour cut-out: 0.5,97 9.5,97 9.5,81 0.5,81
  pour cut-out: 0.5,95.9

## Silkscreen, mask and mechanical layers (free items; w line width, h text height)
Top Overlay:
  drawing of 6186 lines, arcs and shapes, not listed
  text "Tx" at 21.882,107.22 h0.6
  text "Rx" at 12.7,107.2 h0.6
  text "Tx" at 15.3,107.2 h0.6
  text "Rx" at 19.3,107.2 h0.6
  text "SS" at 34.64,72.9 h0.6 r90
  text "GND" at 21.94,72.3 h0.6 r90
  text "RDY" at 24.48,72.3 h0.6 r90
  text "PWM" at 27.02,72.3 h0.6 r90
  text "TCK" at 29.617,72.3 h0.6 r90
  text "SCK" at 32.1,72.3 h0.6 r90
  text "MOSI" at 37.18,71.9 h0.6 r90
  text "MISO" at 39.72,71.8 h0.6 r90
  text "3.3V" at 42.3,71.8 h0.6 r90
  text "VREF" at 44.8,71.7 h0.6 r90
  text "Jan 2020" at 29.074,31.964 h0.8
  text "Lacewing PXE v3.1" at 29.074,30.44 h0.8
  text "For clinical trials" at 29.111,28.86 h0.8
  text "+5VDD" at 20,12 h0.8
  text "VBAT" at 20.7,10.554 h0.8
  text "PACK+" at 20.7,9.122 h0.8
  text "CHR" at 28.1,8.6 h1
  text "PWR" at 37.8,8.6 h1

## Dimensions
0,108.585 to 0,0 on Mechanical 1
0,0 to 62.738,0 on Mechanical 1

## Text inside footprints (layer, text, board x,y; h text height)
DS1: Top Overlay "*" at 5.044,104.813 h1.27; Mechanical 7 "Default Padstyle: RX54Y16D0T" at -1.09,96.93 h1.27; Mechanical 7 "Pin One Padstyle: RX54Y16D0T" at -1.09,95.406 h1.27; Mechanical 7 "Alt 1 Padstyle: OX60Y90D30P" at -0.773,90.834 h1.27; Mechanical 7 "Alt 2 Padstyle: OX90Y60D30P" at -0.773,89.31 h1.27; Mechanical 7 "0.122in/3.099mm" at 5.419,107.521 h0.64; Mechanical 7 "0.198in/5.029mm" at 5.419,109.426 h0.64; Mechanical 7 "0.122in/3.099mm" at 12.397,103.242 h0.64; Mechanical 7 "0.026in/0.65mm" at -1.877,103.891 h0.64; Mechanical 7 "0.026in/0.66mm" at 3.393,98.962 h0.64; Mechanical 13 "*" at 6.314,103.762 h1.27
USB1: Mechanical 1 "Board edge" at 62.543,11.199 h0.2 r90